# Allegro board ex2_rlc.brd
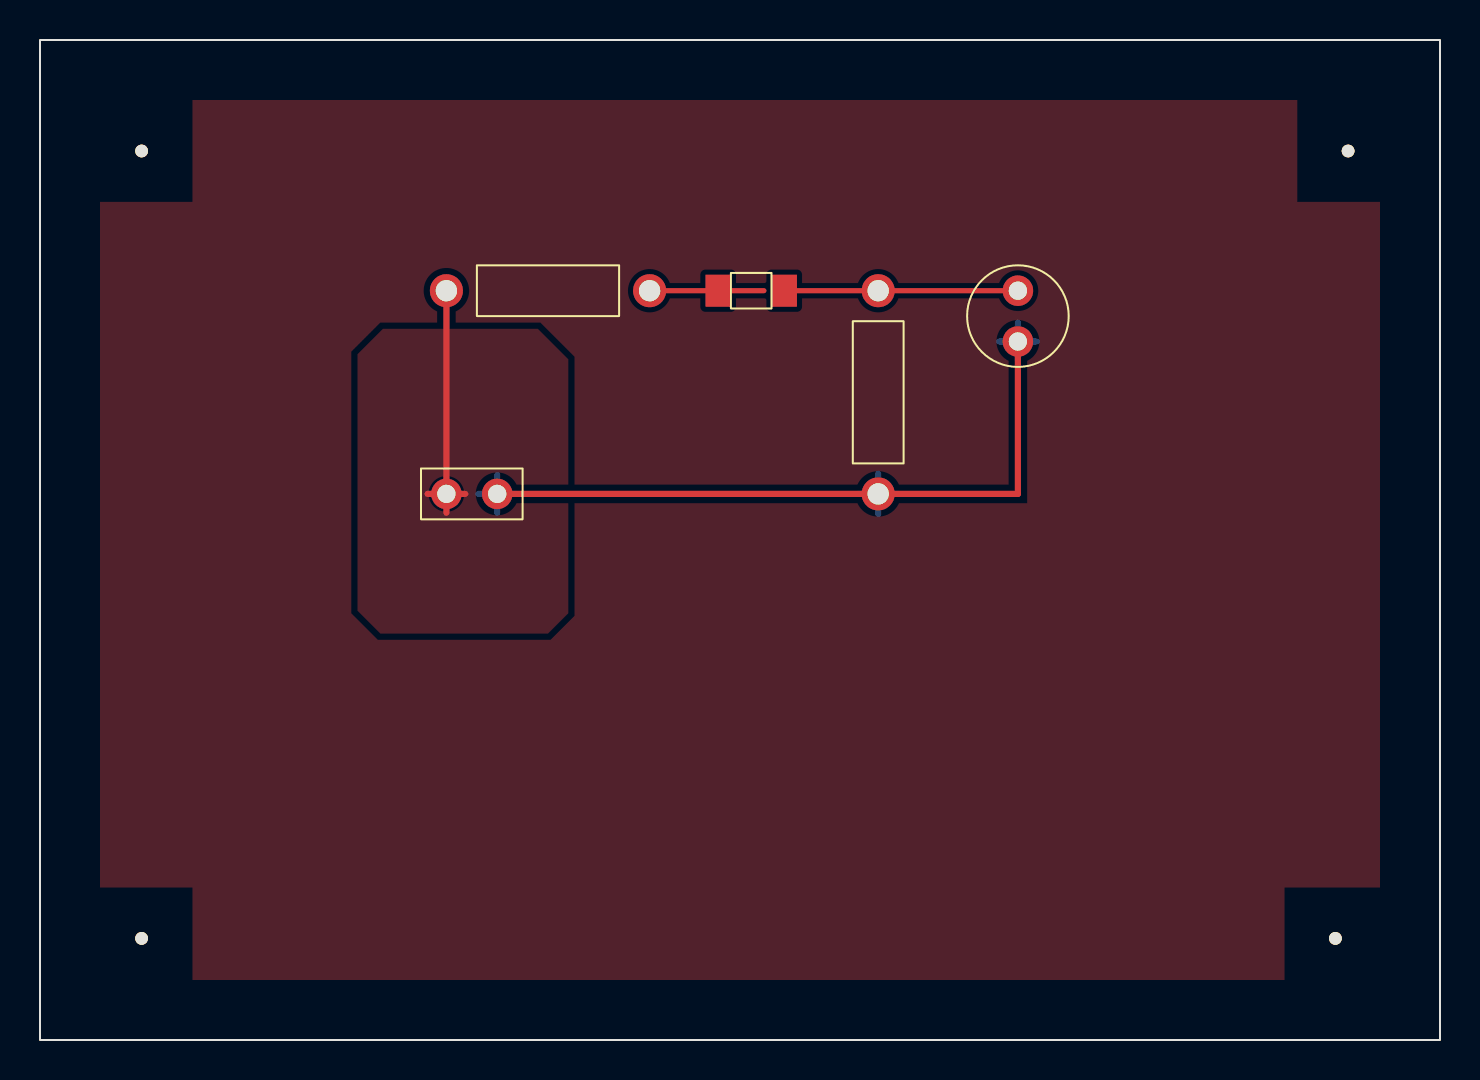
[diagram p0: board, top side]
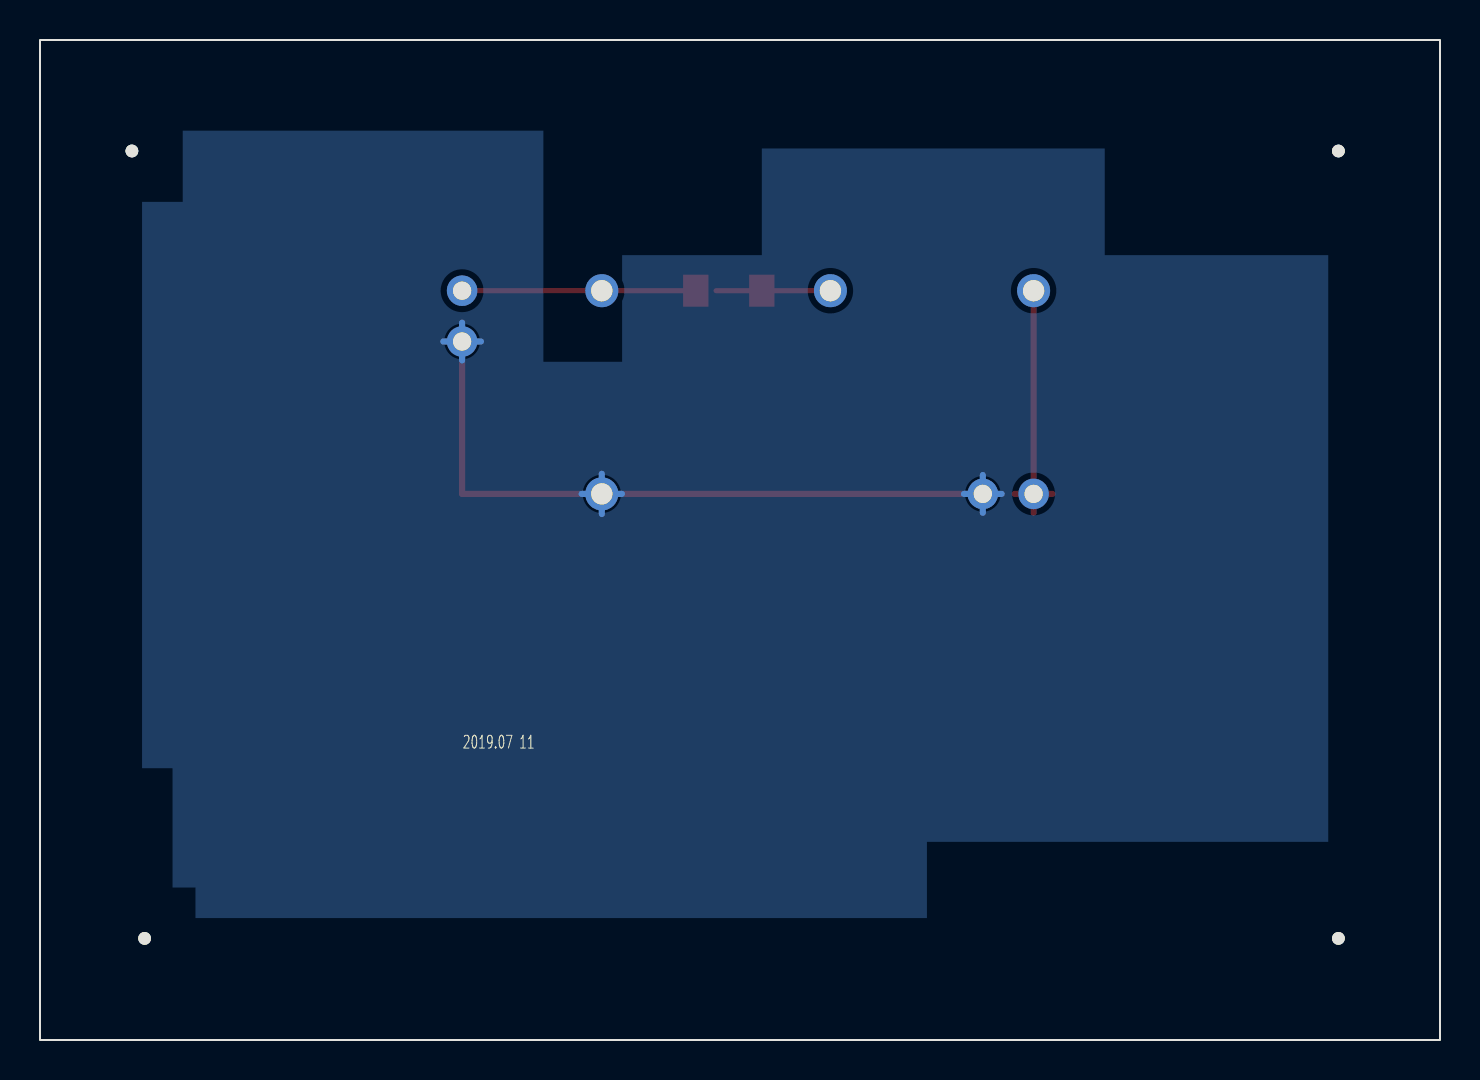
[diagram p1: board, bottom side, seen from below]

Outline 70 x 50 mm; copper layers: TOP, BOTTOM. Coordinates in mm from the lower left corner of the outline.
Outline path: rectangle 0,0 70,50

## Design rules (mm)
constraint set DEFAULT: min track width 0.254
net group BASENETS: nets K N00096

## Placement (name value [footprint] x y rotation side)
C1  1u  [CAP196]  48.9 34.92 0 top
J1  CON2  [JUMPER2]  20.32 27.3 0 top
L1  100n  [SMDRES]  35.56 37.47 0 top
NOREF  -  [unnamed]  5.08 5.08 0 top
NOREF#2  -  [unnamed]  65.41 44.45 0 top
NOREF#3  -  [unnamed]  5.08 44.45 0 top
NOREF#4  -  [unnamed]  64.77 5.08 0 top
R1  330  [RES400]  30.48 37.47 90 top
R2  330  [RES400]  41.91 37.47 180 top

## Library data of the parts
C1 = CAP NP: Tolerance: ***; User Part Number: ***
J1 = CON2: User Part Number: ***
L1 = INDUCTOR: Tolerance: ***; User Part Number: ***
R1 R2 = R: Tolerance: ***; User Part Number: ***

## Footprints (pads in the part's own frame, mm; a bottom-side part is the same pattern mirrored in y, then rotated)
CAP196
  round 1.524 hole 0.914: 1(0,0) 2(0,2.54)
JUMPER2
  round 1.524 hole 0.914: 1(0,0) 2(2.54,0)
RES400
  round 1.651 hole 1.067: 1(0,0) 2(0,10.16)
SMDRES
  rect 1.27x1.6 smd: 1(-1.651,0) 2(1.651,0)
unnamed
  round 0.635 hole 3.175 unplated: (0,0)

## Nets
GND: C1.1 J1.2 R2.2
VCC: J1.1 R1.2
K: L1.1 R1.1
N00096: C1.2 L1.2 R2.1

## Routing (per net, layer and track width the routed paths; a pad name or vN(x,y) marks a point on that pad's centre or on a via; arc(x,y) is an arc through that point)
GND: length 45.2
  TOP w0.308: J1.2 48.9,27.3 C1.1
  BOTTOM w0.308: 41.91,26.3 41.91,27.3 ; 41.91,27.3 41.91,28.31 ; 41.91,27.3 40.9,27.3 ; 41.91,27.3 42.92,27.3 ; 21.92,27.3 J1.2 ; J1.2 23.8,27.3 ; J1.2 22.86,28.25 ; J1.2 22.86,26.36 ; 48.9,33.98 C1.1 ; C1.1 48.9,35.87 ; C1.1 49.84,34.92 ; C1.1 47.95,34.92
VCC: length 13
  TOP w0.308: J1.1 R1.2 ; J1.1 19.38,27.3 ; J1.1 21.26,27.3 ; J1.1 20.32,26.36
K: length 5.7
  TOP w0.254: 36.2,37.47 L1.1 R1.1
N00096: length 11.7
  TOP w0.254: L1.2 R2.1 C1.2

## Copper pours and planes (outline as drawn; the poured copper is in the pictures)
GND on BOTTOM: 44.83,45.47 64.9,45.47 64.9,13.59 63.37,13.59 63.37,6.1 25.65,6.1 25.65,9.91 5.59,9.91 5.59,39.24 16.76,39.24 16.76,44.58 33.91,44.58 33.91,39.24 40.89,39.24 40.89,33.91 44.83,33.91
VCC on TOP: 15.88,21.46 15.88,34.29 17.14,35.56 24.89,35.56 26.42,34.04 26.42,21.34 25.4,20.32 17.02,20.32
Net_1 on TOP: 67,3 3,3 3,47 67,47

## Text on the board
Ref Des/Silkscreen Bottom: 2019.07 11
TOLERANCE_TOP: FIGURE | FINISHED_SIZE | 0.914 | 1.067 | 3.175 | DRILL CHART: TOP to BOTTOM | ALL UNITS ARE IN MILLIMETERS | PLATED | NON-PLATED | QTY | 4
